# Altium PCB PAY_IFP_V1.PcbDoc (part 5 of 5)
Units mil, origin at the board's own origin, x right, y up, seen from the top; angles counter-clockwise.
Board outline 3661.42 x 3543.31 mil, 6 copper layers (L1 TOP, L2 GND 1, L3 SIGNAL, L4 PWR, L5 GND 2, L6 BOT), stack 59.685 mil thick; 511 components, 371 nets, 2264 pads, 383 vias.
Unrouted connection lines stored in the file: 1001.
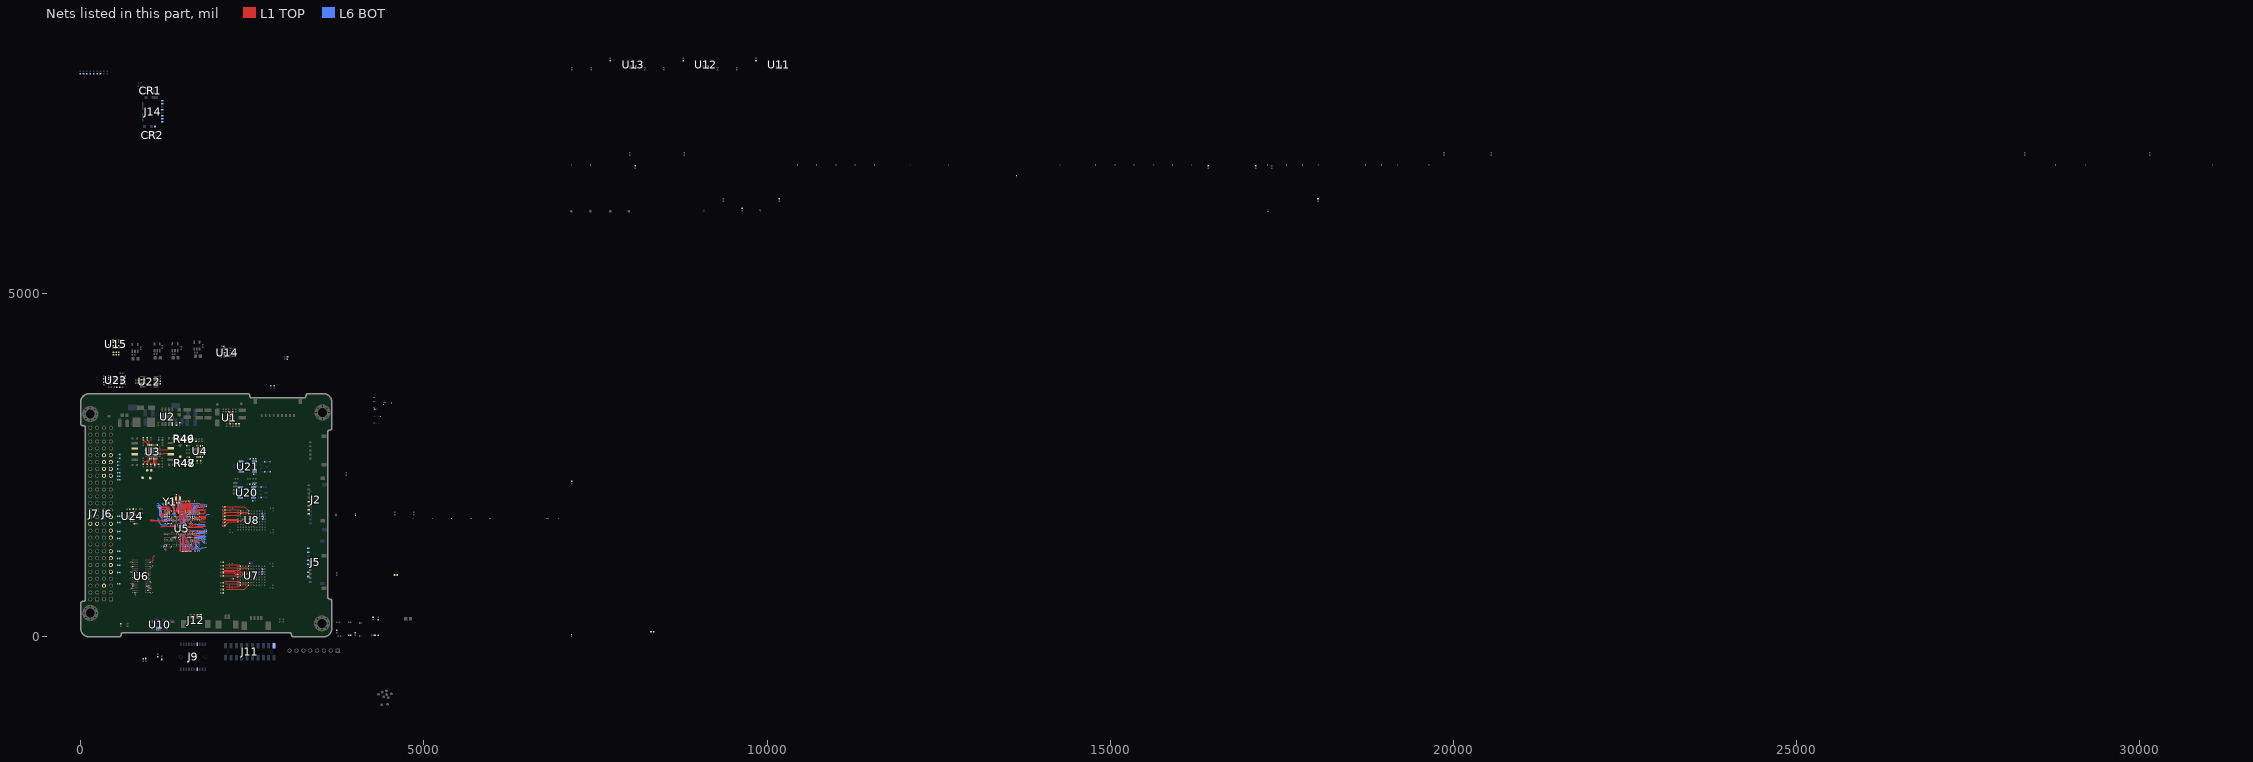
[diagram p4: the nets of this part, all layers, seen from the top]

## Via types
v1: diameter 13.78, hole 5.91, L1 TOP to L6 BOT, 276 vias
v2: diameter 13.78, hole 7.87, L1 TOP to L6 BOT, 71 vias
v3: diameter 15.75, hole 7.87, L1 TOP to L6 BOT, 25 vias
v4: diameter 15.75, hole 7.87, L1 TOP to L6 BOT, tented both sides, 9 vias
v5: diameter 13.78, hole 7.87, L1 TOP to L6 BOT, tented both sides, 2 vias

## Nets (pads, with @x,y where several pads share a name; then routed paths per layer and width w, separated by ;. In a path a pad name is that pad's centre, name@x,y a point inside that pad or via, vN(x,y) a via of type N, cw(c..) or ccw(c..) an arc to the next point about the centre after c; other vN are vias at no path point) (continued)
NetC135_2: C135.2 C136.2 U7.E4@2641.72,949.37 | length 121.2
  L1 TOP w5.91: U7.E4@2641.72,949.37 2644.01,949.37 v5(2661.49,966.85)
  L6 BOT w5.91: C135.2@2645.89,912.52 2653.35,919.98 2653.35,927.51 2661.49,935.65 v5(2661.49,966.85) 2661.3,967.04 2661.3,977.11 2654.84,983.57 2654.84,985.81 2648.13,992.52 C136.2@2645.89,992.52
NetC147_2: C147.2 C148.2 U8.E4@2646.97,1755.83 | length 118.9
  L1 TOP w5.91: U8.E4@2646.64,1755.72 2648.93,1755.72 v5(2666.41,1773.2)
  L6 BOT w5.91: C147.2@2648.4,1796.83 2648.4,1795.84 2664.91,1779.34 2664.91,1774.7 v5(2666.41,1773.2) 2666.41,1734.47 C148.2@2650.81,1718.87
NetC175_2: C175.2 R213.2 R214.1 R215.1
NetC178_2: C178.2 R219.2 R220.1 R221.1
NetCR1_3: CR1.3 J14.P5 R142.2 R189.1
NetCR1_4: CR1.4 J14.P7 R143.2 R185.1
NetCR1_6: CR1.6 J14.P8 R145.2 R186.1
NetCR2_1: CR2.1 J14.P3 R141.2 R190.1
NetCR2_4: CR2.4 J14.P1 R147.2 R187.1
NetCR2_6: CR2.6 J14.P2 R111.2 R188.1
NetD1_2: D1.2 R3.1
NetD4_2: D4.2 R9.1
NetD5_2: D5.2 R12.1
NetD6_2: D6.2 R13.1
NetD7_1: D7.1 R193.2
NetD8_1: D8.1 R224.2
NetD8_2: D8.2 R146.2
NetD9_1: D9.1 R225.2
NetD9_2: D9.2 R148.2
NetJ6_06: J6.06 R14.1
NetJ6_09: J6.09 R15.2
NetJ6_11: J6.11 R16.2
NetJ6_13: J6.13 R17.2
NetJ6_15: J6.15 R18.2
NetJ6_19: J6.19 R19.2
NetJ6_21: J6.21 R20.2
NetJ6_23: J6.23 R21.2
NetJ6_25: J6.25 R22.2
NetJ6_37: J6.37 R23.2
NetJ6_38: J6.38 R24.1
NetJ6_39: J6.39 R25.2
NetJ6_40: J6.40 R26.1
NetJ6_41: J6.41 R27.2
NetJ6_42: J6.42 R28.1
NetJ6_43: J6.43 R29.2
NetJ6_44: J6.44 R30.1
NetJ9_07: J9.07 R31.2 R217.2
NetJ9_08: J9.08 R32.1 R218.2
NetJ11_19: J11.19 R26.2 R116.2
NetJ14_P9: J14.P9 R114.2 R191.1
NetL2_1: L2.1 U3.11 | length 29.5
  L1 TOP w11.81: 923.96,2726.42 U3.11@953.49,2726.42
NetL3_1: L3.1 U3.14 | length 29.5
  L1 TOP w11.81: 923.96,2667.37 U3.14@953.49,2667.37
NetL4_1: L4.1 U3.27 | length 116.5
  L1 TOP w11.81: U3.27@1150.34,2667.04 1205.1,2667.04 1210.35,2672.29 1264.65,2672.29
NetL5_1: L5.1 U3.30 | length 135.3
  L1 TOP w11.81: U3.30@1150.34,2726.1 1220.2,2726.1 1238.24,2726.1 ; 1218.56,2722.16 1221.83,2725.44 1264.65,2725.44
NetR4_2: R4.2 R6.1 U1.2 | length 117.7
  L1 TOP w7.87: R6.1@2158,3278.98 2214.02,3278.98 R4.2@2216.54,3281.5 ; R6.1@2158.19,3278.98 2164.96,3272.2 2164.96,3272.01 2173.79,3263.19 2173.79,3227.59 U1.2@2174,3227.38
NetR5_1: R5.1 R7.1 U1.1
NetR8_1: R8.1 R123.2 U1.9 | length 52.3
  L1 TOP w7.87: U1.9@2173.79,3153.84 2174.77,3152.86 2174.77,3110.09 R8.1@2180.53,3104.33
NetR10_2: R10.2 R11.1 U2.4
NetR33_2: R33.2 U3.22 | length 83.2
  L1 TOP w7.87: R33.2@1079.73,2515.74 1080.69,2516.71 1080.69,2597.18 U3.22@1081.66,2598.15
NetR34_2: R34.2 U3.23 | length 105.6
  L1 TOP w7.87: U3.23@1101.34,2598.15 1101.34,2534.49 1117.6,2518.23 1133.04,2518.23 R34.2@1135.53,2515.74
NetR35_2: R35.2 U3.8 | length 105.8
  L1 TOP w11.81: R35.2@912.35,2868.1 913.33,2868.1 978.56,2802.87 983.23,2802.87 U3.8@983.23,2795
NetR40_1: R40.1 R113.2 U3.1
NetR41_1: R41.1 U4.16
NetR42_1: R42.1 R108.2 U4.1
NetR43_1: R43.1 U4.6
NetR44_1: R44.1 R45.2 U3.18 | length 136.7
  L1 TOP w7.87: R45.2@912.33,2515.74 917.16,2520.57 917.16,2531.33 942.91,2557.08 971.51,2557.08 1000.95,2586.52 1000.95,2596.18 U3.18@1002.92,2598.15
NetR53_1: R53.1 R54.2 U5.H10 | length 306.1
  L1 TOP w3.94: U5.H10@1450.46,1651.97 1462.27,1663.78
  L1 TOP w4.92: 1462.27,1663.78 1462.76,1664.28 1462.76,1672.47 1462.76,1682.66 1461.78,1683.64 1461.78,1715.79 1462.27,1716.28 1462.27,1748.43 1454.72,1755.97 1454.72,1769.93 1452.92,1771.74 1452.92,1856.03 1480.31,1883.42 1480.31,1937.18
NetR91_2: R91.2 R226.2 R227.2 U22.2 U22.3
NetR100_2: R100.2 R204.2
NetR122_2: R122.2 U20.1
NetR124_2: R124.2 U20.4
NetR126_2: R126.2 U21.1
NetR128_2: R128.2 U21.4
NetR131_2: R131.2 R199.2 U14.3
NetR133_2: R133.2 R235.1 U24.15
NetR134_2: R134.2 R236.2 U24.6
NetR135_2: R135.2 R237.2 U24.5
NetR146_1: R146.1 U5.B19 | length 165
  L1 TOP w4.92: U5.B19@1680.77,1805.52 1693.57,1818.31 1693.57,1842.92 1711.28,1860.63 1789.04,1860.63 v1(1802.82,1874.41)
NetR148_1: R148.1 U5.F20 | length 129.1
  L1 TOP w4.92: U5.F20@1706.36,1703.15 1719.09,1715.88 1726.03,1715.88 1726.45,1715.46 1738.77,1715.46 1739.76,1714.47 1759.02,1714.47 1776.24,1731.7 1822.5,1731.7
NetR149_2: R149.2 U3.5
NetR153_2: R153.2 U3.6
NetR160_2: R160.2 R200.2 U14.7
NetR161_2: R161.2 R203.2
NetR163_1: R163.1 U5.AA2 | length 77.9
  L1 TOP w4.92: v1(1228.35,1285.43) 1230.04,1287.12 1233.75,1287.12 1247.21,1300.59 1247.21,1312.41 1247.05,1312.57 1247.05,1317.98 U5.AA2@1245.73,1319.3
  L6 BOT w4.92: v1(1228.35,1285.43) 1228.35,1283.03 1235.96,1275.42 1235.96,1270.01 1238.84,1267.13 1249.67,1267.13
NetR166_2: R166.2 U6.L8 | length 76.9
  L1 TOP w7.87: v1(735.89,945.28) 775.26,945.28 U6.L8@791.01,961.03
  L6 BOT w7.87: 720.63,945.28 v1(735.89,945.28)
NetR196_1: R196.1 U11.2
NetR197_1: R197.1 U12.2
NetR198_1: R198.1 U13.2
NetR201_2: R201.2 U14.1
NetR202_1: R202.1 U15.6
NetR203_1: R203.1 U15.5
NetR204_1: R204.1 U15.4
NetR205_1: R205.1 SB2.1
NetR206_1: R206.1 SB2.2 U15.3
NetR214_2: R214.2 U20.5
NetR216_1: R216.1 U20.8
NetR220_2: R220.2 U21.5
NetR222_1: R222.1 U21.8
NetR229_1: R229.1 R231.1 U23.7
NRST: C48.1 R39.1 R50.2 R202.2 R223.2 U3.2 U5.D3 | length 105.1
  L1 TOP w4.92: 1171.91,1767.13 1224.75,1767.13 1225.24,1767.62 1258.04,1767.62 U5.D3@1271.32,1754.33
NRST_OUT: R51.2 U5.E4 | length 341
  L1 TOP w3.94: v1(1283.13,1741.95) 1283.42,1741.95 1296.63,1728.74 U5.E4@1296.91,1728.74
  L6 BOT w4.92: 1113.84,1949.22 1120.73,1949.22 1178.8,1891.15 1178.8,1777.96 1185.69,1771.07 1254.59,1771.07 1283.13,1742.52 v1(1283.13,1741.95)
PA0: R63.1 U5.U18 | length 172
  L1 TOP w3.94: U5.U18@1655.18,1421.66 1667.98,1408.86 1686.07,1408.86 1687.55,1407.39 1700.98,1407.39 1701.47,1407.88 1736.85,1407.88 1737.34,1407.39 1752.42,1407.39 1755.86,1410.83 1778.84,1410.83 v3(1780.67,1412.66)
  L6 BOT w4.92: v3(1780.67,1412.66) 1800.41,1392.93 1809.96,1392.93 R63.1@1810.32,1392.57
PA1: R64.1 U5.V17 | length 194.4
  L1 TOP w3.94: U5.V17@1629.59,1396.07 v1(1642.39,1383.27)
  L6 BOT w3.94: v1(1642.39,1383.27) 1667.98,1383.27 1680.77,1370.48 1680.77,1304.53
  L6 BOT w4.92: 1680.77,1304.53 1727.89,1257.41
PA2: R66.1 U5.R14 | length 267.9
  L1 TOP w3.94: U5.R14@1552.82,1472.84 v1(1565.61,1485.63)
  L6 BOT w3.94: v1@1565.61,1486.62 1578.41,1499.41 1622.5,1499.41 1622.94,1498.98 1636.24,1498.98 1642.86,1505.59 1684.6,1505.59 1691.22,1512.21 1752.14,1512.21 1752.63,1511.72
  L6 BOT w4.92: v1(1565.61,1485.63) v1@1565.61,1486.62 ; 1752.63,1511.72 1803.3,1511.72
PA3: R67.1 U5.T18 | length 236.5
  L1 TOP w3.94: v1(1642.39,1460.04) U5.T18@1655.18,1447.25
  L6 BOT w4.92: v1(1642.39,1460.04) 1655.95,1446.48 1663.64,1445.28 1669.15,1445.28 1678.28,1436.14 1720.85,1436.14 1722.21,1437.5 1750.56,1437.5 1765.42,1422.64 1765.42,1401.6 1797.31,1369.7 R67.1@1810.32,1369.7
PA4: R68.1 U5.P16 | length 226.7
  L1 TOP w3.94: U5.P16@1604,1498.43 1615.81,1510.24 1669.69,1510.24 v1(1688.98,1529.52)
  L6 BOT w4.92: v1(1688.98,1529.52) 1690.67,1527.83 1701.9,1527.83 1705.71,1524.02 1801.39,1524.02 1807.94,1530.57 1808.3,1530.57 1811.23,1533.5 R68.1@1811.23,1533.86
PA5: R70.1 U5.V16 | length 277.5
  L1 TOP w3.94: U5.V16@1604,1396.07 v1(1616.8,1383.27)
  L6 BOT w4.92: v1(1616.8,1383.27) 1615.32,1381.79 1615.32,1333.84 1608.92,1327.45 1608.92,1281.89 1616.8,1274.02 1638.45,1274.02 1645.83,1281.4 1645.83,1289.28 1652.23,1295.67 1668.96,1295.67 1681.76,1282.88 1681.76,1274.02 1673.88,1266.15 1664.04,1266.15 1659.12,1261.22 1659.12,1250.4 1665.02,1244.49 1666.71,1246.18 R70.1@1668.09,1246.18
PA6: R71.1 U5.T14 | length 242.8
  L1 TOP w3.94: v1(1540.34,1459.73) U5.T14@1552.82,1447.25
  L6 BOT w3.94: 1539.04,1378.11 1539.04,1261.22 1540.02,1260.24
  L6 BOT w4.92: 1539.04,1378.11 1547.9,1386.97 1547.9,1413.57 1541.5,1419.97 1541.5,1458.57 v1(1540.34,1459.73) ; 1540.02,1260.24 1540.02,1259.93 1549.84,1250.12 1550.2,1250.12 R71.1@1550.2,1246.18
PA7: R73.1 U5.P15 | length 276.8
  L1 TOP w3.94: U5.P15@1578.41,1498.43 1590.55,1510.57 v1(1590.55,1537.4)
  L6 BOT w4.92: v1(1590.55,1537.4) 1591.65,1538.5 1653.38,1538.5 1658.67,1543.8 1723.78,1543.8 1728.11,1539.46 1793.21,1539.46 1807.94,1554.19 1808.3,1554.19 1811.23,1557.12 R73.1@1811.23,1557.48
PA8: R75.1 U5.R13 | length 241.1
  L1 TOP w3.94: R75.1@1527.23,1246.18 1527.14,1246.18 1523.75,1249.57 1523.75,1249.66 1512.58,1260.83 1512.58,1355.79 1509.84,1358.53 1509.84,1446.6 1514.43,1451.18 1514.43,1452.55 1525.72,1463.84 1525.72,1471.33 U5.R13@1527.23,1472.84
PA9: R78.1 U5.U14 | length 187.7
  L1 TOP w3.94: v1(1525.26,1362.6) 1540.02,1377.37 1540.02,1408.86 U5.U14@1552.82,1421.66
  L6 BOT w4.92: v1(1525.26,1362.6) 1526.24,1361.62 1526.24,1247.17 R78.1@1527.23,1246.18
PA10: R80.1 U5.R12 | length 236.9
  L1 TOP w3.94: R80.1@1482.6,1246.18 1482.69,1246.18 1494.87,1258.35 1494.87,1348.45 1492.13,1351.19 1492.13,1463.33 U5.R12@1501.64,1472.84
PA11: R82.1 U5.P12 | length 264.3
  L1 TOP w3.94: U5.P12@1501.64,1498.43 1514.43,1485.63 1514.43,1465.95 1500.99,1452.5 1500.99,1354.86 1503.72,1352.12 1503.72,1246.3 R82.1@1503.61,1246.18
PA12: R84.1 U5.W15 | length 146.6
  L1 TOP w4.92: R84.1@1570.87,1246.56 1570.87,1309.44 1566.11,1314.2 1566.11,1324.39 1573.81,1332.09 1583.01,1332.09 1590.71,1339.79 1590.71,1349.98 1579.73,1360.97 1579.73,1369.16 U5.W15@1578.41,1370.48
PA13: R86.1 U5.P11 | length 263.7
  L1 TOP w3.94: U5.P11@1476.05,1498.43 v1(1488.84,1485.63)
  L6 BOT w4.92: v1(1488.84,1485.63) 1500.77,1473.7 1500.77,1249.02 R86.1@1503.61,1246.18
PA14: R88.1 U5.V14 | length 162.2
  L1 TOP w3.94: U5.V14@1552.82,1396.07 v1(1565.61,1383.27)
  L6 BOT w4.92: v1(1565.61,1383.27) 1567.09,1381.8 1567.09,1254.83 1572.56,1249.36 1573.35,1249.36 1577.43,1245.28 R88.1@1577.43,1244.49
PA17: R89.1 U5.R9 | length 239.5
  L1 TOP w3.94: U5.R9@1424.87,1472.84 1454.23,1443.47 1454.23,1249.02 R89.1@1456.69,1246.56
PA18: R90.1 U5.W16 | length 134.7
  L1 TOP w3.94: v1(1598.43,1364.17) 1598.43,1364.54 1604,1370.11 U5.W16@1604,1370.48
  L6 BOT w4.92: v1(1598.43,1364.17) 1598.43,1319.96 1593.24,1314.78 1593.24,1259.75 1603.62,1249.37 1603.62,1249.02 1606.55,1246.08 R90.1@1606.91,1246.08
PA19: R91.1 U5.W18 | length 140.9
  L1 TOP w3.94: R91.1@1614.17,1246.56 1614.17,1263.52 1643.37,1292.72 1643.37,1358.67 U5.W18@1655.18,1370.48
PA21: R92.1 U5.W19 | length 188.5
  L1 TOP w3.94: U5.W19@1680.77,1370.48 1681.26,1370.48 1694.06,1357.68 v1(1694.55,1357.68)
  L6 BOT w4.92: v1(1694.55,1357.68) 1693.57,1356.7 1693.57,1318.31 1726.05,1285.83 1750.65,1285.83 1764.43,1299.61 1804.05,1299.61
PA22: R94.1 U5.P10 | length 273.5
  L1 TOP w3.94: U5.P10@1450.46,1498.43 v1(1463.25,1485.63)
  L6 BOT w4.92: v1(1463.25,1485.63) 1490.93,1457.96 1490.93,1266.39 1480.56,1256.02 1480.56,1246.67 R94.1@1480.07,1246.18
PA23: R96.1 U5.AA20 | length 73.1
  L1 TOP w3.94: R96.1@1706.36,1246.18 U5.AA20@1706.36,1319.3
PA24: R98.1 U5.P9 | length 268.3
  L1 TOP w3.94: U5.P9@1424.87,1498.43 v1(1437.66,1485.63)
  L6 BOT w4.92: v1(1437.66,1485.63) 1460.3,1463 1460.3,1255.71 1459.99,1255.39 1459.99,1249.49 1457.05,1246.56 R98.1@1456.69,1246.56
PA25: R100.1 U5.B21 | length 104.4
  L1 TOP w4.92: U5.B21@1731.95,1805.52 1733.27,1804.2 1738.68,1804.2 1738.84,1804.04 1790.52,1804.04 1822.5,1836.03
PA26: R102.1 U5.K14 | length 279.4
  L1 TOP w3.94: 1587.27,1613.59 1591.2,1609.65 1591.92,1609.65
  L1 TOP w4.92: U5.K14@1552.82,1600.79 1565.61,1613.59 1587.27,1613.59 ; 1591.92,1609.65 1595.77,1605.8 1694.89,1605.8 1697.75,1608.67 1822.5,1608.67
PA29: R106.1 U5.D21 | length 90.6
  L1 TOP w4.92: U5.D21@1731.95,1754.33 1822.5,1754.33
PA30: R107.1 U5.K15 | length 216
  L1 TOP w3.94: U5.K15@1578.41,1600.79 1579.92,1599.28 1589.06,1599.28 1591.49,1596.85 1591.89,1596.45 1773.33,1596.45 1786.62,1583.16 R107.1@1786.62,1582.67
PA31: R108.1 U5.F21 | length 97.9
  L1 TOP w4.92: U5.F21@1731.95,1703.15 1789.04,1703.15 1806.76,1720.87 1822.5,1720.87
PAC1934_TWCK: R37.2 R154.2 U4.4
PAC1934_TWD: R36.2 R150.2 U4.5
PB1: R65.1 U5.G21 | length 90.6
  L1 TOP w4.92: U5.G21@1731.95,1677.56 1822.5,1677.56
PB6: R72.1 U5.K13 | length 138.9
  L1 TOP w3.94: v1(1509.51,1584.06) 1510.5,1584.06 U5.K13@1527.23,1600.79
  L6 BOT w3.94: v1(1509.51,1584.06) 1517.39,1591.93 1525.26,1591.93 1534.12,1600.79 1564.63,1600.79 1616.8,1600.79
PB7: R74.1 U5.C20 | length 129.6
  L1 TOP w4.92: U5.C20@1706.36,1779.93 1719.16,1792.72 1802.82,1792.72 1822.5,1812.41
PB8: R76.1 U5.T19 | length 143.5
  L1 TOP w3.94: U5.T19@1680.77,1447.25 1680.77,1447.35 1693.57,1460.15 v1(1693.57,1460.26)
  L6 BOT w4.92: v1(1693.57,1460.26) 1693.78,1460.04 1791.34,1460.04 1810.32,1441.06 R76.1@1810.32,1440.57
PB9: R79.1 U5.R18 | length 179.7
  L1 TOP w3.94: U5.R18@1655.18,1472.84 1655.34,1472.84 1668.49,1459.69 v1(1668.65,1459.69)
  L6 BOT w4.92: v1(1668.65,1459.69) 1682.36,1445.98 1716.77,1445.98 1718.13,1447.34 1780.42,1447.34 1810.32,1417.44 R79.1@1810.32,1416.95
PB10: R81.1 U5.P17 | length 196.9
  L1 TOP w3.94: U5.P17@1629.59,1498.43 v1(1642.39,1485.63)
  L6 BOT w3.94: v1(1642.39,1485.63) 1655.18,1472.84 1662.31,1472.84 1662.95,1473.47 1672.6,1473.47 1673.17,1474.04 1801.46,1474.04 1807.82,1467.67 1807.91,1467.67 1811.3,1464.29 R81.1@1811.3,1464.19
PB11: R83.1 U5.R19 | length 113.6
  L1 TOP w3.94: U5.R19@1680.77,1472.84 1690.83,1482.89 1699.71,1482.89 1701.47,1484.65 1736.85,1484.65 1738.6,1482.89 1781.53,1482.89 1786.46,1487.81 R83.1@1786.7,1487.81
PB12: R85.1 U5.P18 | length 164.6
  L1 TOP w3.94: U5.P18@1655.18,1498.43 1655.45,1498.43 1666.63,1487.25 v1(1666.9,1487.25)
  L6 BOT w3.94: v1(1666.9,1487.25) 1686.01,1487.25 1690.37,1482.89 1806.47,1482.89 1811.3,1487.72 R85.1@1811.3,1487.81
PB13: R87.1 U5.N14 | length 274.7
  L1 TOP w4.92: U5.N14@1552.82,1524.02 1566.11,1537.31 1566.11,1554.71 1573.31,1561.91 1583.51,1561.91 1591.63,1553.79 1773.38,1553.79 1784.8,1542.37 1784.8,1536.18 R87.1@1786.62,1534.35
PB21: R93.1 U5.D15 | length 212.6
  L1 TOP w3.94: U5.D15@1578.41,1754.33 v1(1591.2,1767.13)
  L1 TOP w4.92: v1(1630.58,1876.88) 1630.58,1891.15 1647.31,1907.88 1647.31,1938.39
  L6 BOT w4.92: v1(1591.2,1767.13) 1615.32,1791.24 1615.32,1861.62 v1(1630.58,1876.88)
PB22: R95.1 U5.C14 | length 396.9
  L1 TOP w3.94: U5.C14@1552.82,1779.93 v1(1552.82,1794.69)
  L6 BOT w4.92: v1(1552.82,1794.69) 1578.41,1820.28 1578.41,1911.81 1609.91,1943.31 1721.13,1943.31 1741.8,1922.64 R95.1@1811.23,1922.64
PB23: R97.1 U5.D14 | length 232
  L1 TOP w3.94: 1539.04,1892.13 1539.04,1788.98 1541.01,1787.01 1541.01,1766.15 U5.D14@1552.82,1754.33
  L1 TOP w4.92: 1539.04,1892.13 1541.99,1895.08 1541.99,1973.43 1542.75,1974.19 1542.75,1974.55 1545.69,1977.48 R97.1@1546.05,1977.48
PB24: R99.1 U5.B15 | length 178.1
  L1 TOP w4.92: U5.B15@1578.41,1805.52 1591.7,1818.8 1591.7,1975.89 R99.1@1593.29,1977.48
PB25: R101.1 U5.A13 | length 151.1
  L1 TOP w4.92: R101.1@1523.29,1977.48 1523.65,1977.48 1526.58,1974.55 1526.58,1974.19 1530.67,1970.1 1530.67,1902.46 1527.23,1899.02 U5.A13@1527.23,1831.11
PB26: R103.1 U5.A15 | length 152.7
  L1 TOP w4.92: R103.1@1569.67,1977.48 1570.03,1977.48 1572.96,1974.55 1572.96,1974.19 1581.48,1965.67 1581.48,1836.04 1578.41,1832.97 U5.A15@1578.41,1831.11
PB27: R105.1 U5.C11 | length 208.8
  L1 TOP w3.94: U5.C11@1476.05,1779.93 1477.28,1781.16 1477.28,1809.86 v1(1478.84,1811.42)
  L6 BOT w4.92: R105.1@1466.32,1977.48 1467.19,1976.61 1467.19,1864.57 1461.28,1858.67 1461.28,1837.01 1470.86,1827.44 1470.86,1821.8 1478.84,1813.82 v1(1478.84,1811.42)
PC2: R113.1 U5.D7 | length 213.4
  L1 TOP w3.94: v1(1360.89,1767.13) U5.D7@1373.69,1754.33
  L6 BOT w3.94: 1355.97,1808.47 1346.39,1798.89 1346.39,1781.63 v1(1360.89,1767.13)
  L6 BOT w4.92: 1348.09,1949.22 1355.97,1941.34 1355.97,1808.47
PC3: R115.1 U5.G8 | length 360.9
  L1 TOP w3.94: v1(1386.48,1690.36) U5.G8@1399.28,1677.56
  L6 BOT w4.92: v1(1386.48,1690.36) 1400.26,1704.14 1417.98,1704.14 1418.47,1703.65 1430.78,1703.65 1453.41,1726.28 1453.41,1799.96 1430.77,1822.59 R115.1@1430.77,1977.48
PC4: R117.1 U5.C2 | length 100.4
  L1 TOP w4.92: R117.1@1157.27,1808.68 1158.01,1807.94 1175.39,1807.94 1190.61,1792.72 1232.94,1792.72 U5.C2@1245.73,1779.93
PC11: R123.1 U5.C1 | length 49.5
  L1 TOP w4.92: 1171.91,1782.88 1174.87,1779.93 U5.C1@1220.14,1779.93
PC12: R125.1 U5.H5 | length 281
  L1 TOP w3.94: v1(1309.71,1664.77) U5.H5@1322.5,1651.97
  L6 BOT w3.94: 1246.72,1636.22 1256.36,1636.22 1266.4,1646.26 1266.4,1647.05 1273.29,1653.94
  L6 BOT w4.92: 1113.84,1726.77 1134.51,1706.11 1134.51,1676.58 1174.87,1636.22 1246.72,1636.22 ; 1273.29,1653.94 1298.88,1653.94 v1(1309.71,1664.77)
PC13: R127.1 U5.D1 | length 48.2
  L1 TOP w4.92: 1171.91,1754.33 U5.D1@1220.14,1754.33
PC14: R129.1 U5.J7 | length 214
  L1 TOP w3.94: 1171.91,1596.85 1185.92,1610.86 1358.17,1610.86 U5.J7@1373.69,1626.38
PC17: R131.1 U5.D4 | length 243
  L1 TOP w3.94: v1(1284.12,1767.13) U5.D4@1296.91,1754.33
  L6 BOT w3.94: 1269.85,1787.8 1269.85,1798.63 1270.58,1799.37
  L6 BOT w4.92: 1183.72,1949.22 1271.32,1861.62 1271.32,1800.11 1270.58,1799.37 ; 1269.85,1787.8 1269.85,1781.4 v1(1284.12,1767.13)
PC22: R136.1 U5.F4 | length 323
  L1 TOP w3.94: v1(1284.12,1715.95) U5.F4@1296.91,1703.15
  L6 BOT w4.92: R136.1@1125.77,1914.15 1125.77,1913.79 1128.71,1910.86 1130.55,1910.86 1166.01,1875.4 1166.01,1771.07 1184.71,1752.37 1253.12,1752.37 1268.86,1736.62 1268.86,1736.04 1271.32,1733.58 1271.32,1728.74 v1(1284.12,1715.95)
PC23: R137.1 U5.A3 | length 149.9
  L1 TOP w4.92: R137.1@1157.27,1884.22 1158.01,1883.48 1242.57,1883.48 1271.32,1854.73 U5.A3@1271.32,1831.11
PC24: R138.1 U5.F5 | length 292.4
  L1 TOP w3.94: v1(1309.3,1716.93) 1309.3,1716.65 1322.5,1703.44 U5.F5@1322.5,1703.15
  L6 BOT w3.94: 1296.91,1821.26 1297.9,1820.28 1297.9,1761.42 1296.91,1760.44 1296.91,1728.74 1308.72,1716.93 v1(1309.3,1716.93)
  L6 BOT w4.92: R138.1@1211.4,1947.46 1211.89,1947.46 1222.9,1936.45 1224.05,1936.45 1296.91,1863.59 1296.91,1821.26
PC25: R139.1 U5.B3 | length 151.2
  L1 TOP w4.92: R139.1@1157.27,1860.39 1158.01,1859.65 1241.8,1859.65 1258.53,1842.92 1258.53,1818.31 U5.B3@1271.32,1805.52
PC26: R140.1 U5.G6 | length 427.3
  L1 TOP w3.94: v1(1335.3,1715.95) 1335.3,1690.36 U5.G6@1348.09,1677.56
  L6 BOT w3.94: 1277.23,1703.15 1277.43,1703.15 1278.41,1702.17 1299.97,1702.17 1300.95,1703.15 1322.5,1703.15
  L6 BOT w4.92: R140.1@1125.77,1889.39 1125.77,1888.9 1150.26,1864.41 1150.26,1764.18 1185.69,1728.74 1185.69,1697.25 1195.95,1686.99 1261.07,1686.99 1277.23,1703.15 ; 1322.5,1703.15 v1(1335.3,1715.95)
PC27: R141.1 U5.C15 | length 166.2
  L1 TOP w3.94: 1566.6,1852.76 1566.6,1836 1566.6,1800.62 1566.6,1791.74 U5.C15@1578.41,1779.93
  L1 TOP w4.92: 1565.61,1938.39 1565.61,1890.16 1569.55,1886.22 1569.55,1873.43 1566.6,1870.48 1566.6,1852.76
PC28: R142.1 U5.D16 | length 239.1
  L1 TOP w3.94: U5.D16@1604,1754.33 v1(1616.8,1767.13)
  L1 TOP w4.92: v1(1714.24,1925.59) 1714.24,1938.39
  L6 BOT w4.92: v1(1616.8,1767.13) 1617.29,1767.13 1643.86,1793.7 1643.86,1856.7 1643.37,1857.19 1643.37,1869.49 1699.47,1925.59 v1(1714.24,1925.59)
PC29: R143.1 U5.B16 | length 146.3
  L1 TOP w3.94: U5.B16@1604,1805.52 1616.8,1818.31 1616.8,1825.81 1615.81,1826.79 1615.81,1845.08 1615.81,1895.08 1616.8,1896.07
  L1 TOP w4.92: 1616.8,1896.07 1634.51,1913.78 1634.51,1938.39
PC30: R145.1 U5.D17 | length 241.8
  L1 TOP w3.94: U5.D17@1629.59,1754.33 v1(1642.39,1767.13)
  L1 TOP w4.92: v1(1728.02,1907.88) 1735.89,1915.75 1735.89,1938.39
  L6 BOT w4.92: v1(1642.39,1767.13) 1654.2,1778.94 1654.2,1786.32 1653.7,1786.81 1653.7,1798.63 1654.2,1799.12 1654.2,1856.7 1705.38,1907.88 v1(1728.02,1907.88)
PC31: R147.1 U5.A16 | length 107.3
  L1 TOP w4.92: U5.A16@1604,1831.11 1604,1938.39
PD0: R111.1 U5.C16 | length 213.9
  L1 TOP w3.94: v1(1591.2,1792.72) U5.C16@1604,1779.93
  L1 TOP w4.92: v1(1678.8,1928.55) 1678.8,1938.39
  L6 BOT w4.92: v1(1591.2,1792.72) 1604,1805.52 1604,1877.37 1624.67,1898.04 1648.29,1898.04 v1(1678.8,1928.55)
PD2: R114.1 U5.G13 | length 296.1
  L1 TOP w3.94: 1504.59,1874.41 1504.59,1808.26 1503.61,1807.28 1503.61,1741.12 1514.02,1730.71 1533.13,1730.71 1541.01,1722.84 1541.01,1691.34 U5.G13@1527.23,1677.56
  L1 TOP w4.92: 1504.59,1874.41 1504.59,1940.89
PD3: R116.1 U5.B18 | length 221.9
  L1 TOP w4.92: U5.B18@1655.18,1805.52 1667.98,1818.31 1667.98,1861.62 1698.49,1892.13 1763.45,1892.13 1778.21,1906.89 1778.21,1938.39
PD6: R118.1 U5.G10 | length 272.5
  L1 TOP w4.92: U5.G10@1450.46,1677.56 1450.46,1696.26 1444.88,1701.84 1444.88,1765.85 1443.07,1767.66 1443.07,1860.1 1467.19,1884.22 1467.19,1937.06
PD7: R119.1 U5.A20 | length 129.6
  L1 TOP w4.92: U5.A20@1706.36,1831.11 1720.14,1844.89 1803.8,1844.89 1822.5,1863.59
PD8: R120.1 U5.G14 | length 309.2
  L1 TOP w3.94: v1(1540.02,1664.77) U5.G14@1552.82,1677.56
  L1 TOP w4.92: v1(1553.8,1878.35) 1553.8,1938.39
  L6 BOT w3.94: v1(1540.02,1664.77) 1540.02,1710.24 1541.01,1711.23 1541.01,1787.01 1540.02,1788 1540.02,1802.56
  L6 BOT w4.92: 1540.02,1802.56 1567.09,1829.63 1567.09,1865.06 v1(1553.8,1878.35)
PD9: R121.1 U5.F14 | length 300.4
  L1 TOP w3.94: U5.F14@1552.82,1703.15 v1(1565.61,1690.36)
  L1 TOP w4.92: v1(1619.75,1924.61) 1619.75,1938.39
  L6 BOT w4.92: v1(1565.61,1690.36) 1551.34,1704.63 1551.34,1773.53 1591.2,1813.39 1591.2,1896.07 v1(1619.75,1924.61)
PD10: R122.1 U5.G16 | length 265.1
  L1 TOP w3.94: v1(1591.2,1639.18) 1591.2,1664.77 U5.G16@1604,1677.56
  L6 BOT w4.92: v1(1591.2,1639.18) 1592.68,1640.65 1686.67,1640.65 1689.47,1637.85 1806.34,1637.85 1809.27,1640.79 R122.1@1809.27,1641.15
PD11: R124.1 U5.H11 | length 355.4
  L1 TOP w4.92: U5.H11@1476.05,1651.97 1489.33,1665.26 1489.33,1684.94 1490.81,1686.42 1490.81,1698.23 1476.05,1713 1476.05,1758.27 1464.57,1769.75 1464.57,1774.01 1462.76,1775.81 1462.76,1851.95 1492.13,1881.32 R124.1@1492.13,1977.48
PD12: R126.1 U5.D18 | length 295.2
  L1 TOP w3.94: U5.D18@1655.18,1754.33 1667.98,1767.13 v1(1667.98,1792.72)
  L1 TOP w4.92: 1755.58,1907.88 1760.5,1912.8 1760.5,1938.39
  L6 BOT w4.92: v1(1667.98,1792.72) 1667.98,1847.84 1707.35,1887.21 1734.91,1887.21 1745.33,1897.64 R126.1@1811.23,1897.64
PD13: R128.1 U5.J11 | length 385.1
  L1 TOP w3.94: U5.J11@1476.05,1626.38 v1(1488.84,1613.59)
  L6 BOT w3.94: v1(1488.84,1613.59) 1500.65,1625.4 1500.65,1653.94 1502.68,1655.97 1502.68,1848.88 1505.57,1851.78
  L6 BOT w4.92: 1505.57,1851.78 1512.46,1858.67 1512.46,1897.05 1564.63,1949.22
PD16: R130.1 U5.E18 | length 173.4
  L1 TOP w4.92: U5.E18@1655.18,1728.74 1668.47,1742.03 1701.27,1742.03 1737.05,1742.03 1738.53,1743.51 1822.5,1743.51
PD17: R132.1 U5.H13 | length 362.7
  L1 TOP w3.94: v1(1514.43,1639.18) U5.H13@1527.23,1651.97
  L6 BOT w3.94: v1(1514.43,1639.18) 1514.43,1710.24 1511.54,1713.14 1511.54,1838.05 1514.43,1840.95
  L6 BOT w4.92: 1514.43,1840.95 1528.21,1854.73 1528.21,1885.24 1592.19,1949.22
PD18: R133.1 U5.H16 | length 227.9
  L1 TOP w3.94: U5.H16@1604,1651.97 1615.81,1640.16 1624.7,1640.16 1625.68,1639.18 1673.62,1639.18 1687.09,1625.7 1687.09,1621.96 v1(1688.98,1620.07)
  L6 BOT w4.92: v1(1688.98,1620.07) 1691.38,1620.07 1693.34,1618.11 R133.1@1809.27,1618.11 R133.1@1813.8,1622.63
PD19: R134.1 U5.F18 | length 256.3
  L1 TOP w3.94: U5.F18@1655.18,1703.15 v1(1667.98,1715.95)
  L6 BOT w4.92: v1(1667.98,1715.95) 1683.16,1715.95 1687,1712.1 1753.7,1712.1 1779.2,1737.6 1792.98,1737.6 1842.19,1786.81 1873.69,1786.81
PD20: R135.1 U5.J12 | length 350.5
  L1 TOP w3.94: v1(1486.87,1639.18) 1487.86,1639.18 1500.65,1626.38 U5.J12@1501.64,1626.38
  L6 BOT w3.94: v1(1486.87,1639.18) 1486.87,1651.97 1488.84,1653.94 1488.84,1661.81 1493.82,1666.79 1493.82,1906.95 1496.72,1909.85
  L6 BOT w4.92: 1496.72,1909.85 1536.09,1949.22
PE4: R156.1 U5.AA13 | length 82.7
  L1 TOP w3.94: U5.AA13@1527.23,1319.3 1527.72,1318.8 1527.72,1268.66 1546.72,1249.66 1546.72,1249.57 1550.1,1246.18 R156.1@1550.2,1246.18
PE9: R158.1 U5.Y16 | length 104.3
  L1 TOP w3.94: R158.1@1590.55,1246.18 1590.55,1322.55 1602.49,1334.49 1602.49,1343.38 U5.Y16@1604,1344.89
PIOBU0: R160.1 U5.J10 | length 348.8
  L1 TOP w3.94: U5.J10@1450.46,1626.38 v1(1463.25,1639.18)
  L6 BOT w4.92: 1454.39,1949.22 1454.39,1870.48 1448.49,1864.57 1448.49,1818.8 1470.14,1797.15 1470.63,1797.15 1476.05,1791.74 1476.05,1713 1461.78,1698.72 1461.78,1686.42 1463.25,1684.94 v1(1463.25,1639.18)
PIOBU1: R161.1 U5.A5 | length 139.7
  L1 TOP w4.92: 1220.47,1905.51 1259.77,1905.51 1293.96,1871.32 1293.96,1859.65 U5.A5@1322.5,1831.11
QSPI0_CAL: R55.2 U5.M13 | length 33.4
  L1 TOP w3.94: U5.M13@1527.23,1549.61 v1(1540.02,1562.41)
  L6 BOT w3.94: v1(1540.02,1562.41) 1555.28,1562.41
RS422_DE: R94.2 R234.2 U23.3
RS422_R\E\: R92.2 R230.1 U23.2
RS_422_RX_N: J5.8 R16.1 R232.2 U23.10
RS_422_RX_P: J5.7 R15.1 R232.1 U23.11
RS_422_TX_N: J5.5 R18.1 R233.1 U23.9
RS_422_TX_P: J5.4 R17.1 R233.2 U23.8
SAM_RTC_I2C_SCL: R155.2 U14.4
SAM_RTC_I2C_SDA: R151.2 U14.5
SDMMC0_CAL: R56.2 U5.R16 | length 58
  L1 TOP w3.94: v1(1565.61,1460.04) 1591.2,1460.04 U5.R16@1604,1472.84
  L6 BOT w3.94: 1565.61,1445.77 v1(1565.61,1460.04)
SDMMC0_CLK: R63.2 R175.2 U7.P6@2287.39,870.63 | length 29.2
  L1 TOP w5.91: v2(2266.51,850.47) 2266.88,850.47 2287.03,870.63 U7.P6@2287.39,870.63
SDMMC0_CMD: R64.2 R176.2 U7.P5@2287.39,910 | length 221.4
  L1 TOP w5.91: R176.2@2077.2,937.08 2228.6,937.08 2255.68,910 U7.P5@2287.39,910
SDMMC0_D0: R67.2 R167.2 U7.K2@2444.87,1028.11 | length 24.8
  L1 TOP w5.91: U7.K2@2444.87,1028.11 2446.13,1028.11 2461.92,1043.89 2463.18,1043.89
SDMMC0_D1: R68.2 R168.2 U7.N2@2326.76,1028.11 | length 220.9
  L1 TOP w5.91: 2114.58,1047.52 2307.35,1047.52 2311.49,1043.38 2311.49,1042.27 2325.65,1028.11 U7.N2@2326.76,1028.11
SDMMC0_D2: R78.2 R169.2 U7.K3@2444.87,988.74 | length 346.1
  L1 TOP w5.91: 2106.34,1007.13 2426.47,1007.13 U7.K3@2444.87,988.74
SDMMC0_D3: R80.2 R170.2 U7.N3@2326.76,988.74 | length 241.9
  L1 TOP w5.91: 2091.68,972.2 2310.22,972.2 U7.N3@2326.76,988.74
SDMMC0_D4: R70.2 R171.2 U7.N8@2326.76,791.89 | length 233.3
  L1 TOP w5.91: 2102.4,813.48 2305.17,813.48 U7.N8@2326.76,791.89
SDMMC0_D5: R71.2 R172.2 U7.K8@2444.87,791.89 | length 346.2
  L1 TOP w5.91: 2107.71,770.17 2423.15,770.17 U7.K8@2444.87,791.89
SDMMC0_D6: R73.2 R173.2 U7.N9@2326.76,752.52 | length 215.2
  L1 TOP w5.91: 2119.76,732.62 2306.86,732.62 U7.N9@2326.76,752.52
SDMMC0_D7: R75.2 R174.2 U7.K9@2444.87,752.52 | length 341.8
  L1 TOP w5.91: 2127.97,692.52 2384.87,692.52 U7.K9@2444.87,752.52
SDMMC0_DS: R82.2 U7.K5@2444.87,910 | length 398.6
  L1 TOP w5.91: 2066,957.68 2231.59,957.68 2256.44,932.83 2422.03,932.83 U7.K5@2444.87,910
SDMMC0_NRST: R66.2 R177.2 U7.M5@2366.13,910 | length 294.2
  L1 TOP w5.91: R177.2@2080.09,890.37 2346.5,890.37 U7.M5@2366.13,910
SDMMC1_CAL: R57.2 U5.B13 | length 138.2
  L1 TOP w3.94: 1514.43,1938.39 1514.43,1818.31 U5.B13@1527.23,1805.52
SDMMC1_CLK: R97.2 R182.2 U8.P6@2292.64,1677.09 | length 238.2
  L1 TOP w5.91: 2085.4,1603.13 2103.12,1620.84 R182.2@2103.12,1621.83 ; R182.2@2100.12,1628.83 2110.12,1628.83 2158.27,1676.98 U8.P6@2292.31,1676.98
SDMMC1_CMD: R95.2 R183.2 U8.P5@2292.64,1716.46 | length 213.7
  L1 TOP w5.91: 2085.4,1693.79 2103.12,1711.51 R183.2@2103.12,1712.49 ; R183.2@2106.12,1712.83 2109.64,1716.35 U8.P5@2292.31,1716.35
SDMMC1_D0: R99.2 R178.2 U8.K2@2450.12,1834.57 | length 406.9
  L1 TOP w5.91: 2084.94,1874.66 2103.12,1892.84 R178.2@2103.12,1893.83 ; R178.2@2097.12,1900.83 2099.12,1898.83 2385.42,1898.83 2448.53,1835.72 U8.K2@2448.53,1833.87
SDMMC1_D1: R101.2 R179.2 U8.N2@2332.01,1834.57 | length 270.9
  L1 TOP w5.91: 2079.44,1823.83 2103.12,1847.51 R179.2@2103.12,1848.49 ; R179.2@2104.12,1851.83 2106.16,1853.87 2312.27,1853.87 U8.N2@2331.68,1834.46
SDMMC1_D2: R103.2 R180.2 U8.K3@2450.12,1795.2 | length 394.1
  L1 TOP w5.91: 2077.47,1776.53 2103.12,1802.18 R180.2@2103.12,1803.16 ; R180.2@2105.12,1803.83 2105.12,1804.81 2110.81,1810.5 2111.79,1810.5 2114.78,1813.48 2431.4,1813.48 U8.K3@2449.79,1795.09
SDMMC1_D3: R105.2 R181.2 U8.N3@2332.01,1795.2 | length 267.5
  L1 TOP w5.91: 2085.4,1739.13 2103.12,1756.84 R181.2@2103.12,1757.83 ; R181.2@2107.12,1758.83 2107.12,1761.48 2110.81,1765.17 2113.46,1765.17 2120.66,1772.36 2309.18,1772.36 U8.N3@2332.01,1795.2
SDMMC1_NRST: R93.2 R184.2 U8.M5@2371.38,1716.46 | length 310.2
  L1 TOP w5.91: 2085.4,1648.46 2103.12,1666.18 R184.2@2103.12,1667.16 ; R184.2@2108.12,1669.83 2108.12,1673.14 2131.69,1696.72 2351.42,1696.72 U8.M5@2371.05,1716.35
SDMMC2_CAL: R58.2 U5.E14 | length 116.4
  L1 TOP w3.94: v1(1525.32,1787.71) 1522.65,1787.71 1517.41,1782.47 1515.25,1782.47 1512.46,1779.69 1512.46,1749.41 1521.32,1740.56 1541.01,1740.56 U5.E14@1552.82,1728.74
  L6 BOT w3.94: v1(1525.32,1787.71) 1525.32,1800.57 1527.23,1802.48 1527.23,1807.98
SENSE1_N: R46.4 U4.12
SENSE1_P: R46.3 U4.11
SENSE2_N: R47.4 U4.14
SENSE2_P: R47.3 U4.13
SENSE3_N: R48.4 U4.7
SENSE3_P: R48.3 U4.8
SENSE4_N: R49.4 U4.9
SENSE4_P: R49.3 U4.10
SHDN: R35.1 U5.B4 | length 189.6
  L1 TOP w4.92: 1171.91,1893.33 1257.33,1893.33 1284.12,1866.54 1284.12,1818.31 U5.B4@1296.91,1805.52
SPI_CLK_EXP_PC104: J2.4 R20.1
SPI_CS_EXP_PC104: J2.2 R19.1
SPI_MISO_EXP_PC104: J2.3 R22.1
SPI_MOSI_EXP_PC104: J2.1 R21.1
STX_12V: J7.23 J7.24
STX_GPIO: R14.2 R88.2
STX_RS485_N: J5.2 R23.1 R228.1 U22.7
STX_RS485_P: J5.1 R24.2 R228.2 U22.6
USB_CONNECTOR_N: J12.3 U24.11
USB_CONNECTOR_P: J12.4 U24.12
USB_DEBUG_N: U10.2 U24.14
USB_DEBUG_P: U10.3 U24.13
USBA_N: U5.F1 U24.3 | length 207.6
  L1 TOP w4.92: 1015.21,1704.72 1059.22,1704.72 1063.25,1700.69 1213.81,1700.69 1214.96,1701.84 1218.82,1701.84 U5.F1@1220.14,1703.15
USBA_P: U5.F2 U24.2 | length 237.7
  L1 TOP w4.92: 1015.21,1693.9 1054.73,1693.9 1058.77,1689.87 1224.25,1689.87 1236.22,1701.84 1244.41,1701.84 U5.F2@1245.73,1703.15
VBUS: D7.2 U10.1
VDDBU: C78.2 R38.2 R53.2 R60.2 U5.E8 | length 252.8
  L1 TOP w11.81: v1(1386.48,1741.54) U5.E8@1399.28,1728.74
  L6 BOT w4.92: 1370.73,1806.5 1370.73,1803.55 1375.65,1798.63 1375.65,1782.88 1373.69,1780.91 1373.69,1775 1377.83,1770.86 1377.83,1752.59 1386.48,1743.94 v1(1386.48,1741.54)
  L6 BOT w11.81: 1370.73,1806.5 1370.73,1949.22 ; v1(1386.48,1741.54) 1404.21,1743.87 C78.2@1405.23,1743.87
VDDCORE: C43.2 C44.2 C45.2 C46.2 C47.2 C49.2 C50.2 C51.2 C52.2 C53.2 C54.2 C55.2 C56.2 C57.2 C58.2 C59.2 R48.2 TP9.0 U5.B2 U5.F6 U5.F15 U5.H3 U5.J9 U5.J13 U5.J16 U5.N13 U5.N16 U5.T15 U5.U16 U5.U17 U5.U19 U5.V19 | length 521.6
  L1 TOP w11.81: v1(1232.94,1818.31) U5.B2@1245.73,1805.52 ; v1(1252.62,1651.97) U5.H3@1271.32,1651.97 ; U5.F6@1348.09,1703.15 v1(1360.89,1690.36) ; v1(1412.07,1613.59) U5.J9@1424.87,1626.38 ; U5.N13@1527.23,1524.02 v1(1540.02,1536.81) ; U5.J13@1527.23,1626.38 v1(1540.02,1639.18) ; v1(1565.61,1715.95) U5.F15@1578.41,1703.15 ; U5.T15@1578.41,1447.25 v1(1591.2,1434.45) ; U5.U16@1604,1421.66 v1(1616.8,1408.86) ; U5.N16@1604,1524.02 v1(1618.76,1524.02) ; U5.J16@1604,1626.38 v1(1618.76,1626.38) ; U5.U17@1629.59,1421.66 v1(1642.39,1408.86) ; U5.V19@1680.77,1396.07 v1(1693.57,1383.27) ; U5.U19@1680.77,1421.66 v1(1695.54,1421.66)
  L6 BOT w11.81: C44.2@1230.48,1834.06 v1(1232.94,1818.31) C43.2@1235.89,1792.72 ; C47.2@1237.37,1651.97 v1(1252.62,1651.97) ; C45.2@1345.63,1690.36 v1(1360.89,1690.36) ; v1(1412.07,1613.59) 1412.07,1626.87 C49.2@1413.06,1627.86 ; v1(1540.02,1536.81) C52.2@1555.77,1534.35 ; v1(1540.02,1639.18) C50.2@1542.03,1626.31 ; v1(1565.61,1715.95) C46.2@1580.87,1715.95 ; v1(1591.2,1434.45) C54.2@1591.2,1449.71 ; C55.2@1602.52,1408.86 v1(1616.8,1408.86) ; v1(1618.76,1524.02) C53.2@1634.02,1524.02 ; v1(1618.76,1626.38) C51.2@1634.02,1626.38 ; v1(1642.39,1408.86) C56.2@1658.13,1411.32 ; v1(1695.54,1421.66) C57.2@1710.79,1421.66 ; C58.2@1710.79,1400 v1(1693.57,1383.27) C59.2@1721.13,1368.51
VDDCPU: C37.2 C38.2 C39.2 C40.2 C41.2 C42.2 R49.2 TP10.0 U5.B20 U5.E16 U5.E17 U5.E19 U5.F17 | length 193
  L1 TOP w11.81: U5.E16@1604,1728.74 v1(1616.8,1741.54) ; v1(1616.8,1690.36) U5.F17@1629.59,1703.15 ; U5.E17@1629.59,1728.74 v1(1642.39,1741.54) ; U5.E19@1680.77,1728.74 1682.77,1726.75 1692.54,1726.75 v1(1692.92,1726.37) ; U5.B20@1706.36,1805.52 v1(1719.16,1818.31)
  L6 BOT w11.81: C39.2@1601.54,1741.54 v1(1616.8,1741.54) ; C42.2@1614.33,1674.61 v1(1616.8,1690.36) ; C40.2@1642.39,1726.28 v1(1642.39,1741.54) ; v1(1692.92,1726.37) 1693.29,1726.75 1709.44,1726.75 C41.2@1710.89,1728.2 ; C37.2@1717.19,1792.72 1719.16,1794.69 v1(1719.16,1818.31) C38.2@1721.62,1834.06
VDDIODDR: C83.1 C84.1 C85.1 C86.1 C87.1 C88.1 C89.1 C90.1 C91.1 C92.1 C93.1 C94.1 C95.1 C96.1 C97.1 C98.1 C99.1 C101.1 C102.1 C103.1 C104.2 C105.2 C106.2 C107.2 C108.2 C109.2 C110.2 C111.2 C112.2 C113.2 C114.2 C115.2 C116.2 C117.2 C118.2 C119.2 C120.2 C121.2 R47.2 R162.2 R164.2 TP7.0 U5.AA5 U5.M11 U5.N6 U5.N9 U5.N12 U5.P3 U5.P13 U5.T6 U5.T7 U5.T9 U5.U3 U5.U5 U5.U6 U5.W8 U5.Y2 U6.A1 U6.A8 U6.B2 U6.C1 U6.C9 U6.D2 U6.D9 U6.E9 U6.F1 U6.G7 U6.H2 U6.H9 U6.K2 U6.K8 U6.N1 U6.N9 U6.R1 U6.R9 | length 1503.9
  L1 TOP w7.87: v1(732.45,1087.01) U6.R9@759.51,1087.01 ; v1(1035.1,1087.01) 1060.69,1112.6 1060.69,1165.75 1069.06,1174.12 1069.06,1185.44
  L1 TOP w11.81: U6.K8@791.01,929.53 v1(806.76,945.28) ; U6.G7@822.5,835.04 v1(838.25,819.3) ; v1(1232.94,1332.09) U5.Y2@1245.73,1344.89 ; v1(1239.83,1422.05) 1240.36,1422.05 1245.67,1416.74 1266.4,1416.74 U5.U3@1271.32,1421.66 ; v1(1245.73,1498.43) U5.P3@1271.32,1498.43 ; v1(1309.71,1408.86) U5.U5@1322.5,1421.66 ; v1(1322.5,1290.75) U5.AA5@1322.5,1319.3 ; v1(1333.33,1524.02) U5.N6@1348.09,1524.02 ; v1(1335.3,1408.86) U5.U6@1348.09,1421.66 ; U5.T6@1348.09,1447.25 v1(1360.89,1434.45) ; U5.T7@1373.69,1447.25 v1(1386.48,1460.04) ; v1(1399.28,1355.71) U5.W8@1399.28,1370.48 ; v1(1412.07,1511.22) U5.N9@1424.87,1524.02 ; U5.T9@1424.87,1447.25 v1(1437.66,1434.45) ; v1(1463.25,1536.81) U5.M11@1476.05,1549.61 ; v1(1488.84,1536.81) U5.N12@1501.64,1524.02 ; v1(1514.43,1511.22) U5.P13@1527.23,1498.43
  L1 TOP w13.78: v1(735.89,1024.02) U6.N9@759.51,1024.02 ; v1(742.78,709.06) U6.C9@759.51,709.06 ; v1(742.78,772.05) U6.E9@759.51,772.05 ; v1(742.78,866.54) U6.H9@759.51,866.54 ; U6.D9@759.51,740.55 v1(775.26,756.3) ; v1(791.01,629.33) U6.A8@791.01,646.07 ; U6.B2@979.98,677.56 v1(995.73,693.31) ; U6.D2@979.98,740.55 v1(995.73,724.81) ; U6.H2@979.98,866.54 v1(995.73,850.79) ; U6.K2@979.98,929.53 v1(995.73,913.78) ; U6.A1@1011.48,646.07 v1(1035.1,646.07) ; U6.C1@1011.48,709.06 v1(1035.1,709.06) ; U6.F1@1011.48,803.55 v1(1035.1,803.55) ; U6.N1@1011.48,1024.02 v1(1035.1,1024.02) ; U6.R1@1011.48,1087.01 v1(1035.1,1087.01)
  L6 BOT w11.81: 716.2,1092.43 721.24,1087.39 732.07,1087.39 v1(732.45,1087.01) ; 720.14,1029.43 v1(735.89,1024.02) ; v1(806.76,945.28) C88.1@821.52,939.87 ; C113.2@1224.59,1421.67 1239.45,1421.67 v1(1239.83,1422.05) ; C109.2@1230.48,1498.43 v1(1245.73,1498.43) ; v1(1309.71,1408.86) C114.2@1309.71,1424.12 ; C104.2@1318.08,1524.02 v1(1333.33,1524.02) ; v1(1322.5,1290.75) C118.2@1322.5,1306.01 ; C115.2@1333.33,1424.12 v1(1335.3,1408.86) ; v1(1360.89,1434.45) C110.2@1376.64,1431.99 ; C111.2@1371.22,1460.04 v1(1386.48,1460.04) ; C105.2@1398.78,1501.38 v1(1412.07,1511.22) ; C116.2@1399.28,1340.46 v1(1399.28,1355.71) ; C112.2@1437.66,1419.2 v1(1437.66,1434.45) ; C106.2@1463.25,1552.07 v1(1463.25,1536.81) v1(1488.84,1536.81) ; C107.2@1488.84,1552.07 v1(1488.84,1536.81) ; C108.2@1516.89,1495.48 v1(1514.43,1511.22) v1(1488.84,1536.81)
  L6 BOT w13.78: 727.03,703.65 v1(742.78,709.06) ; 727.03,777.46 v1(742.78,772.05) ; 727.03,861.13 v1(742.78,866.54) ; C85.1@759.51,751.87 v1(775.26,756.3) ; 785.59,645.08 v1(791.01,629.33) 792.98,605.71 ; C86.1@823,819.3 v1(838.25,819.3) ; C83.1@963.25,738.59 v1(995.73,724.81) C84.1@995.73,745.97 ; 974.57,677.56 v1(995.73,693.31) ; C87.1@990.32,898.04 v1(995.73,913.78) ; 995.73,829.63 v1(995.73,850.79) ; 1019.35,714.47 v1(1035.1,709.06) ; 1019.35,798.13 v1(1035.1,803.55) ; v1(1035.1,646.07) C93.1@1050.85,651.48 ; v1(1035.1,1024.02) 1050.85,1029.43 ; v1(1035.1,1087.01) 1050.85,1092.43 ; C119.2@1210.3,1316.34 v1(1232.94,1332.09) C117.2@1249.67,1329.63
VDDOUT25: C71.2 C72.2 C73.2 C74.2 C75.2 C76.2 C77.2 U5.D2 U5.E3 U5.E5 U5.J6 U5.T16 U5.W11 U5.W14 | length 245.9
  L1 TOP w11.81: U5.D2@1245.73,1754.33 1245.73,1739.57 v1(1256.56,1728.74) U5.E3@1271.32,1728.74 ; v1(1310.69,1741.54) 1310.69,1741.01 1322.5,1729.2 U5.E5@1322.5,1728.74 ; v1(1327.43,1626.38) U5.J6@1348.09,1626.38 ; v1(1476.05,1355.71) U5.W11@1476.05,1370.48 ; v1(1552.82,1355.71) U5.W14@1552.82,1370.48 ; U5.T16@1604,1447.25 v1(1616.8,1434.45)
  L6 BOT w11.81: C77.2@1242.29,1737.6 v1(1256.56,1728.74) C71.2@1249.28,1706.89 ; v1(1310.69,1741.54) C73.2@1324.96,1741.54 ; C74.2@1312.17,1626.38 v1(1327.43,1626.38) ; C76.2@1476.05,1340.46 v1(1476.05,1355.71) ; C72.2@1552.82,1340.46 v1(1552.82,1355.71) ; v1(1616.8,1434.45) C75.2@1616.8,1449.71
VLDO1: C35.2 TP6.0 U3.19 | length 105
  L1 TOP w7.87: C35.2@968.13,2515.74 968.8,2516.4 968.8,2533.76 1020.63,2585.59 1020.63,2596.18 U3.19@1022.6,2598.15
VLDO2: C36.2 TP8.0 U3.21 | length 108.4
  L1 TOP w7.87: C36.2@1023.93,2515.74 1025.45,2517.25 1042.84,2517.25 1061.97,2536.38 U3.21@1061.97,2598.15
WKUP: R38.1 U3.7 U5.A8 | length 145.2
  L1 TOP w4.92: 1383.53,1882.48 1399.28,1866.73 U5.A8@1399.28,1831.11
  L1 TOP w11.81: R38.1@970.08,2868.11 971.06,2868.11 1002.92,2836.26 U3.7@1002.92,2795
XIN24M: C79.1 R61.2 U5.B7 Y1.1 | length 221.1
  L1 TOP w4.92: C79.1@1251.97,1938.48 1269.19,1938.48 Y1.1@1279.53,1948.82 1281.5,1948.82 1293.8,1936.52 1334.75,1895.57 R61.2@1343.44,1895.57 ; R61.2@1344.14,1896.53 1360.4,1880.27 1360.4,1818.8 U5.B7@1373.69,1805.52
XIN32K: C81.1 R62.2 U5.A9 Y2.1 | length 250.8
  L1 TOP w4.92: U5.A9@1424.87,1831.11 1424.87,1939.02 R62.2@1434.54,1948.7 ; R62.2@1434.54,1951.28 1435.53,1952.27 1435.53,2005.74 Y2.1@1446.85,2017.06 1446.85,2030.84 1436.4,2041.29 1436.4,2070.49 C81.1@1436.02,2070.87
XOUT24M: C80.1 R61.1 U5.A7 Y1.3 | length 206.2
  L1 TOP w4.92: C80.1@1341.04,2015.75 1341.04,1998.52 Y1.3@1332.68,1990.16 1334.65,1990.16 1368.5,1956.31 1368.5,1911.62 1373.69,1906.44 U5.A7@1373.69,1831.11
XOUT32K: C82.1 R62.1 U5.B9 Y2.2 | length 288.1
  L1 TOP w4.92: C82.1@1397.89,2071.49 1397.89,2027.16 Y2.2@1387.8,2017.06 1385.87,2015.14 1385.87,2003.28 1399.11,1990.04 R62.1@1399.11,1951.28 1397.96,1950.13 1412.07,1936.02 1412.07,1818.31 U5.B9@1424.87,1805.52
pads on no net: CR1.1 CR2.3 J3.3 J6.02 J6.04 J6.05 J6.07 J6.08 J6.10 J6.12 J6.14 J6.16 J6.17 J6.18 J6.20 J6.22 J6.24 J6.26 J6.27 J6.28 J6.29 J6.30 J6.31 J6.32 J6.33 J6.34 J6.35 J6.36 J6.45 J6.46 J6.47 J6.48 J6.49 J6.50 J6.51 J6.52 J7.01 J7.02 J7.03 J7.04 J7.05 J7.06 J7.07 J7.08 J7.09 J7.10 J7.11 J7.12 J7.13 J7.14 J7.15 J7.16 J7.17 J7.18 J7.19 J7.20 J7.21 J7.22 J7.33 J7.34 J7.35 J7.36 J7.37 J7.38 J7.39 J7.40 J7.41 J7.42 J7.43 J7.44 J7.49 J7.50 J7.51 J7.52 J9. J9.09 J9.10 J9.11 J9.12 J9.13 J9.14 J9.15 J9.16 J10.4 J11. J11.1 J11.3 J11.4 J11.5 J11.6 J11.7 J11.8 J11.9 J11.15 J11.17 J11.20 J13.1 J14.14 J14.15 U2.2 U2.3 U2.5 U3.17 U5.A2 U5.A4 U5.A18 U5.A19 U5.AA15 U5.AA16 U5.AA18 U5.AA19 U5.B1 U5.C3 U5.C5 U5.C6 U5.C8 U5.C18 U5.C19 U5.C21 U5.D5 U5.D6 U5.D8 U5.D19 U5.D20 U5.E6 U5.F3 U5.F7 U5.F8 U5.F19 U5.G3 U5.G4 U5.G12 U5.G18 U5.G19 U5.G20 U5.H4 U5.H6 U5.H7 U5.H12 U5.H15 U5.H17 U5.H18 U5.J1 U5.J2 U5.J8 U5.J14 U5.J15 U5.J20 U5.J21 U5.K8 U5.K9 U5.K10 U5.K12 U5.L13 U5.L14 U5.M10 U5.M12 U5.M14 U5.M15 U5.N11 U5.N15 U5.N20 U5.N21 U5.R10 U5.R20 U5.R21 U5.T20 U5.T21 U5.V15 U5.V20 U5.V21 U5.W20 U5.W21 U5.Y13 U5.Y15 U5.Y18 U5.Y19 U5.Y20 U5.Y21 U6.J1 U6.J9 U6.L1 U6.L9 U7. U7.A1 U7.A2 U7.A9 U7.A10 U7.B1 U7.B10 U7.D2 U7.D3 U7.D4 U7.D5 U7.D6 U7.D7 U7.D8 U7.D9 U7.E2 U7.E3 U7.E4@2641.72,949.37 U7.E5 U7.E6 U7.E7 U7.E8 U7.E9 U7.F2@2602.35,1028.11 U7.F3@2602.35,988.74 U7.F4@2602.35,949.37 U7.F5@2602.35,910 U7.F6@2602.35,870.63 U7.F7@2602.35,831.26 U7.F8@2602.35,791.89 U7.F9@2602.35,752.52 U7.G2@2562.98,1028.11 U7.G3@2562.98,988.74 U7.G4@2562.98,949.37 U7.G5@2562.98,910 U7.G6@2562.98,870.63 U7.G7@2562.98,831.26 U7.G8@2562.98,791.89 U7.G9@2562.98,752.52 U7.H2@2523.61,1028.11 U7.H3@2523.61,988.74 U7.H4 U7.H5 U7.H6 U7.H7 U7.H8@2523.61,791.89 U7.H9@2523.61,752.52 U7.J2 U7.J3 U7.J4 U7.J5@2484.24,910 U7.J6 U7.J7 U7.J8 U7.J9 U7.K2@2444.87,1028.11 U7.K3@2444.87,988.74 U7.K4 U7.K5@2444.87,910 U7.K6 U7.K7 U7.K8@2444.87,791.89 U7.K9@2444.87,752.52 U7.L2@2405.5,1028.11 U7.L3@2405.5,988.74 U7.L4@2405.5,949.37 U7.L5 U7.L6 U7.L7@2405.5,831.26 U7.L8@2405.5,791.89 U7.L9@2405.5,752.52 U7.M2 U7.M3 U7.M4@2366.13,949.37 U7.M5@2366.13,910 U7.M6 U7.M7@2366.13,831.26 U7.M8 U7.M9 U7.N2@2326.76,1028.11 U7.N3@2326.76,988.74 U7.N4 U7.N5 U7.N6 U7.N7 U7.N8@2326.76,791.89 U7.N9@2326.76,752.52 U7.P2@2287.39,1028.11 U7.P3@2287.39,988.74 U7.P4 U7.P5@2287.39,910 U7.P6@2287.39,870.63 U7.P7 U7.P8@2287.39,791.89 U7.P9@2287.39,752.52 U7.T1 U7.T10 U7.U1 U7.U2 U7.U9 U7.U10 U8.A1 U8.A2 U8.A9 U8.A10 U8.B1 U8.B10 U8.D2 U8.D3 U8.D4 U8.D5 U8.D6 U8.D7 U8.D8 U8.D9 U8.E2 U8.E3 U8.E4@2646.97,1755.83 U8.E5 U8.E6 U8.E7 U8.E8 U8.E9 U8.F2@2607.6,1834.57 U8.F3@2607.6,1795.2 U8.F4@2607.6,1755.83 U8.F5@2607.6,1716.46 U8.F6@2607.6,1677.09 U8.F7@2607.6,1637.72 U8.F8@2607.6,1598.35 U8.F9@2607.6,1558.98 U8.G2@2568.23,1834.57 U8.G3@2568.23,1795.2 U8.G4@2568.23,1755.83 U8.G5@2568.23,1716.46 U8.G6@2568.23,1677.09 U8.G7@2568.23,1637.72 U8.G8@2568.23,1598.35 U8.G9@2568.23,1558.98 U8.H2@2528.86,1834.57 U8.H3@2528.86,1795.2 U8.H4 U8.H5 U8.H6 U8.H7 U8.H8@2528.86,1598.35 U8.H9@2528.86,1558.98 U8.J2 U8.J3 U8.J4 U8.J5@2489.49,1716.46 U8.J6 U8.J7 U8.J8 U8.J9 U8.K2@2450.12,1834.57 U8.K3@2450.12,1795.2 U8.K4 U8.K5 U8.K6 U8.K7 U8.K8 U8.K9 U8.L2@2410.75,1834.57 U8.L3@2410.75,1795.2 U8.L4@2410.75,1755.83 U8.L5 U8.L6 U8.L7@2410.75,1637.72 U8.L8@2410.75,1598.35 U8.L9@2410.75,1558.98 U8.M2 U8.M3 U8.M4@2371.38,1755.83 U8.M5@2371.38,1716.46 U8.M6 U8.M7@2371.38,1637.72 U8.M8 U8.M9 U8.N2@2332.01,1834.57 U8.N3@2332.01,1795.2 U8.N4 U8.N5 U8.N6 U8.N7 U8.N8 U8.N9 U8.P2@2292.64,1834.57 U8.P3@2292.64,1795.2 U8.P4 U8.P5@2292.64,1716.46 U8.P6@2292.64,1677.09 U8.P7 U8.P8@2292.64,1598.35 U8.P9@2292.64,1558.98 U8.T1 U8.T10 U8.U1 U8.U2 U8.U9 U8.U10 U10.4 U14.8 U14.10 U23.EPAD U24.7 U24.8 U24.9 U24.10 U24.16
copper on no net:
  other v1: 1170.93,1102.76 1170.93,1181.5 1591.2,1383.27 1437.66,1613.59 1463.25,1613.59 1437.66,1639.18 1565.61,1664.77 1642.39,1664.77 1667.98,1664.77 1667.98,1690.36 1693.57,1690.36 1360.89,1715.95 1386.48,1715.95 1693.57,1767.13 1693.57,1792.72

## Keep-outs
Keep-Out Layer:
  lines w3.94: 0,485.44 cw(c31.49,485.44) 31.49,516.94 ; 0,125.98 ccw(c125.98,125.98) 125.98,0 ; 0,3108.27 ccw(c31.5,3108.27) 31.5,3076.77 ; 0,3417.32 cw(c125.98,3417.32) 125.71,3543.31 ; 39.37,516.92 ccw(c39.37,548.41) 70.86,548.41 ; 39.37,3076.77 cw(c39.37,3045.28) 70.87,3045.28 ; 559.06,0 ccw(c559.06,31.5) 590.55,31.5 cw(c622.05,31.5) 622.05,62.99 ; 2433.07,3543.31 cw(c2433.07,3511.81) 2464.57,3511.81 ccw(c2496.06,3511.81) 2496.06,3480.31 ; 3039.37,62.99 cw(c3039.37,31.5) 3070.87,31.5 ccw(c3102.36,31.5) 3102.36,0 ; 3251.97,3480.31 ccw(c3251.97,3511.81) 3283.46,3511.81 cw(c3314.96,3511.81) 3314.96,3543.31 ; 3535.43,0 ccw(c3535.43,125.98) 3661.42,125.98 ; 3535.71,3543.31 cw(c3535.43,3417.32) 3661.42,3417.6 ; 3598.43,582.68 ccw(c3629.92,582.68) 3629.92,551.18 cw(c3629.92,519.69) 3661.42,519.69 ; 3598.42,2980.59 cw(c3629.92,2980.59) 3629.92,3012.09 ccw(c3629.92,3043.59) 3661.42,3043.59

## Other copper
L1 TOP:
  region net NetL5_1: 1316.32,2716.58 1316.32,2734.3 1212.98,2734.3 1212.98,2716.58
  region net NetL4_1: 1212.98,2681.15 1212.98,2663.43 1316.32,2663.43 1316.32,2681.15
  region net GND: 1182.07,2708.66 1182.07,2688.98 1346.46,2688.98 1346.46,2708.66
  region net NetL2_1: 928.88,2714.61 928.88,2732.33 870.81,2732.33 870.81,2714.61
  region net 5V: 1174.95,2653.59 1174.95,2592.56 1208.41,2592.56 1208.41,2653.59
  region net 5V: 895.42,2653.59 895.42,2592.56 928.88,2592.56 928.88,2653.59
  region net NetL3_1: 870.81,2679.18 870.81,2661.46 928.88,2661.46 928.88,2679.18
  region net 5V: 928.88,2740.2 928.88,2801.22 895.42,2801.22 895.42,2740.2
  region net 5V: 1208.41,2740.2 1208.41,2800.24 1174.95,2800.24 1174.95,2740.2
  region net GND: 935.77,2687.05 935.77,2706.74 774.22,2706.74 774.22,2687.05
  region net GND: 929.87,2703.78 938.08,2712 946.6,2712 946.6,2690 929.87,2690
  region net GND: 929.87,2690.01 938.73,2681.14 946.6,2681.14 946.6,2692.95 929.87,2692.95
  region net GND: 1173.96,2690 1165.1,2681.14 1157.23,2681.14 1157.23,2704.77 1173.96,2704.77
  region net GND: 1173.96,2703.79 1165.75,2712 1157.23,2712 1157.23,2700.82 1173.96,2700.82